# EAGLE board 1nuc_sluyba (EAGLE 8.5.0)
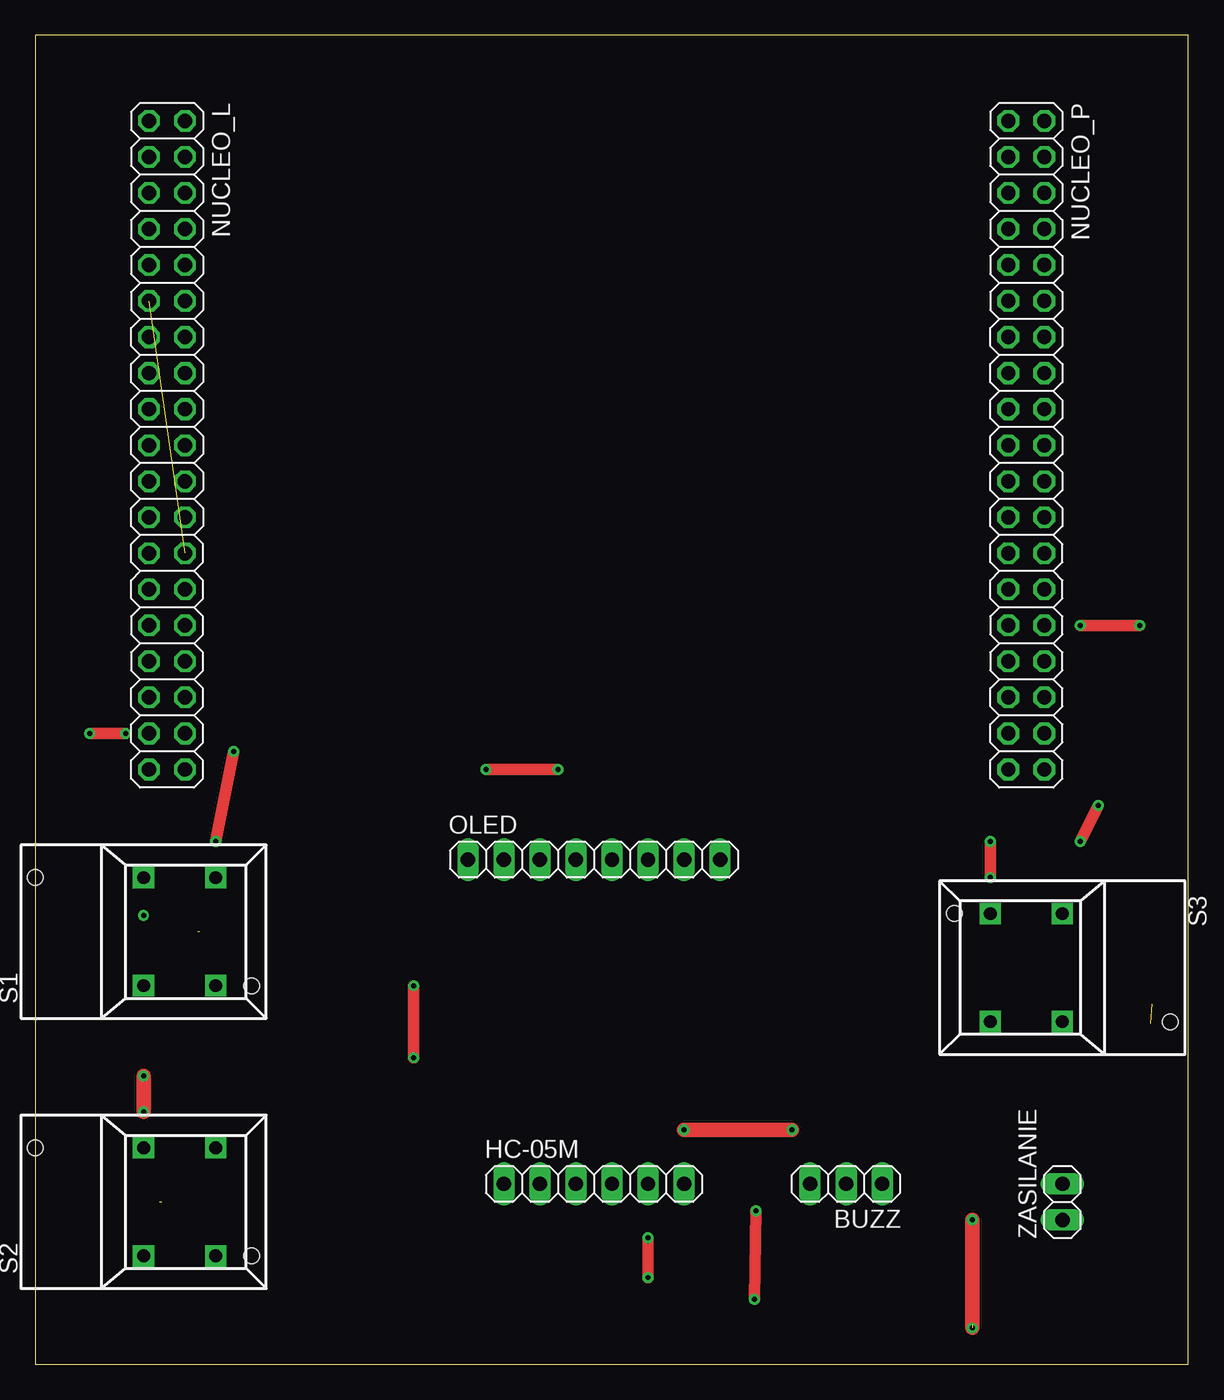
[diagram p0: board, top side]
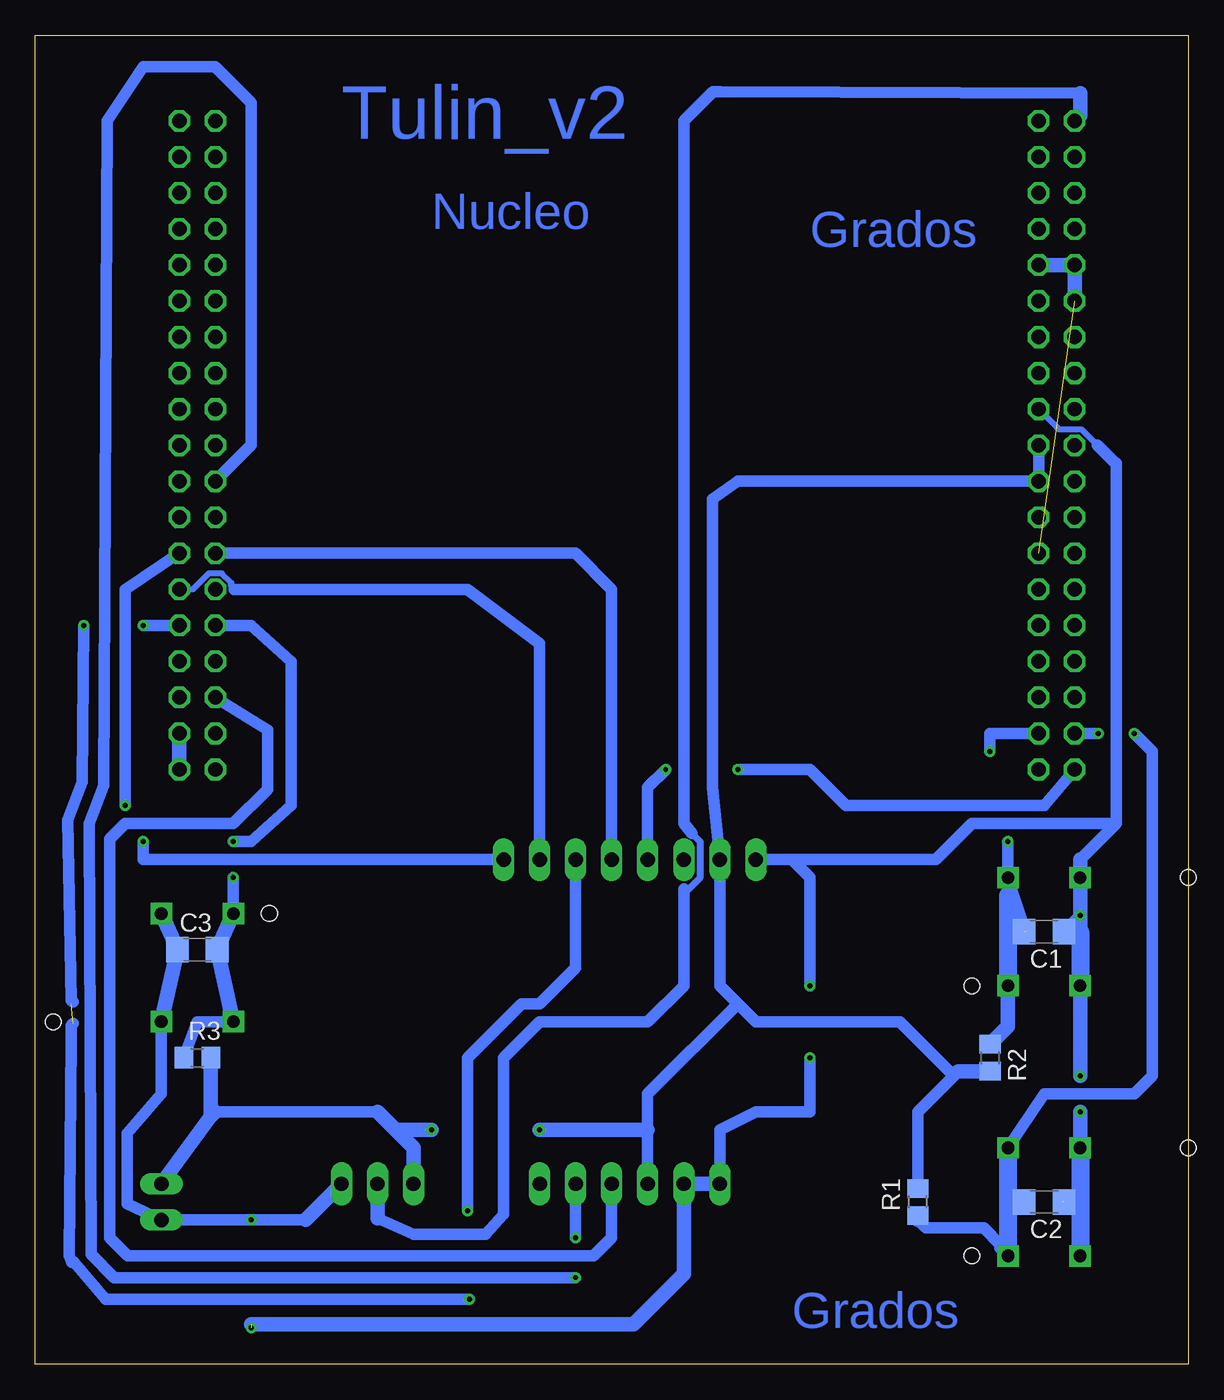
[diagram p1: board, bottom side, seen from below]

Size 81.26 x 93.65 mm. Coordinates in mm from the lower left corner, seen from the top.
Outline: 0,0 81.26,0 81.26,93.65 0,93.65 0,0
Copper layers (1*16): Top 0.035mm / dielectric 1.5mm / Bottom 0.035mm
Design rules "default": minimum track width 6mil, minimum drill 0.35mm, track to track 6mil, track to pad 6mil, pad to pad 6mil, via to via 6mil, smd to smd 6mil, copper to edge 40mil, drill to drill 6mil, minimum pad ring 10mil, minimum via ring 8mil, stop-mask expansion 4mil, vias tented up to drill 0mil, thermal gap 10mil

## Footprints (pad centres in the part's own frame; a part is rotated, then mirrored left to right if it is on the bottom)
1X03 = drill 1.016 long: 1 -2.54,0; 2 0,0; 3 2.54,0
C1206 = smd 1.6 x 1.8: 1 -1.4,0; 2 1.4,0
1X06 = drill 1.016 long: 1 -6.35,0; 2 -3.81,0; 3 -1.27,0; 4 1.27,0; 5 3.81,0; 6 6.35,0
2X19 = drill 1.016 octagon: 1 -22.86,-1.27; 2 -22.86,1.27; 3 -20.32,-1.27; 4 -20.32,1.27; 5 -17.78,-1.27; 6 -17.78,1.27; 7 -15.24,-1.27; 8 -15.24,1.27; 9 -12.7,-1.27; 10 -12.7,1.27; 11 -10.16,-1.27; 12 -10.16,1.27; 13 -7.62,-1.27; 14 -7.62,1.27; 15 -5.08,-1.27; 16 -5.08,1.27; 17 -2.54,-1.27; 18 -2.54,1.27; 19 0,-1.27; 20 0,1.27; 21 2.54,-1.27; 22 2.54,1.27; 23 5.08,-1.27; 24 5.08,1.27; 25 7.62,-1.27; 26 7.62,1.27; 27 10.16,-1.27; 28 10.16,1.27; 29 12.7,-1.27; 30 12.7,1.27; 31 15.24,-1.27; 32 15.24,1.27; 33 17.78,-1.27; 34 17.78,1.27; 35 20.32,-1.27; 36 20.32,1.27; 37 22.86,-1.27; 38 22.86,1.27
1X08 = drill 1.016 long: 1 -8.89,0; 2 -6.35,0; 3 -3.81,0; 4 -1.27,0; 5 1.27,0; 6 3.81,0; 7 6.35,0; 8 8.89,0
R0805 = smd 1.3 x 1.5: 1 -0.95,0; 2 0.95,0
5501 = drill 0.9 pad 1.5 square: 1A 0,3.81; 1B 0,-3.81; NC 5.08,-3.81; NO 5.08,3.81 | hole 1.1: -7.62,3.81; 7.62,-3.81
1X02 = drill 1.016 long: 1 -1.27,0; 2 1.27,0

## Placement (x,y rotation side)
BUZZ  [1X03]  57.15,12.7 180 top
C1  100n  [C1206]  10.16,30.48 180 bottom
C2  100n  [C1206]  10.16,11.43 180 bottom
C3  100n  [C1206]  69.85,29.21 0 bottom
HC-05M  [1X06]  39.37,12.7 0 top
NUCLEO_L  [2X19]  9.27,64.77 270 top
NUCLEO_P  [2X19]  69.85,64.77 270 top
OLED  [1X08]  39.37,35.56 0 top
R1  100k  [R0805]  19.05,11.43 90 bottom
R2  100k  [R0805]  13.97,21.59 270 bottom
R3  100k  [R0805]  69.85,21.59 0 bottom
S1  5501  [5501]  7.62,30.48 0 top
S2  5501  [5501]  7.62,11.43 0 top
S3  5501  [5501]  72.39,27.94 180 top
ZASILANIE  [1X02]  72.39,11.43 90 top

## Library data of the parts
BUZZ HC-05M NUCLEO_L NUCLEO_P OLED ZASILANIE = pinhead
C1-C3 = rcl; SPICEPREFIX: C
R1-R3 = rcl; SPICEPREFIX: R
S1-S3 = switch

## Nets
3V: NUCLEO_L.16
AGND: NUCLEO_P.32
AVDD: NUCLEO_P.7
BOOTO: NUCLEO_L.7
E5V: NUCLEO_L.6
GND: BUZZ.3 HC-05M.3 NUCLEO_L.20 NUCLEO_L.22 OLED.2 R1.2 R2.2 R3.2 ZASILANIE.2
GND1: NUCLEO_L.8
GND2: NUCLEO_P.9
GND3: NUCLEO_L.19
GNDA: NUCLEO_P.20
IOREF: NUCLEO_L.12
NC: NUCLEO_L.9 NUCLEO_L.10 NUCLEO_L.11 NUCLEO_L.26
NCA: NUCLEO_P.10
NCB: NUCLEO_P.18
NCC: NUCLEO_P.36 NUCLEO_P.38
PA0: NUCLEO_L.28
PA1: NUCLEO_L.30
PA2: NUCLEO_P.35
PA3: NUCLEO_P.37
PA4: NUCLEO_L.32
PA5: NUCLEO_P.11
PA6: NUCLEO_P.13
PA7: NUCLEO_P.15
PA8: NUCLEO_P.23
PA9: HC-05M.5 NUCLEO_P.21
PA10: HC-05M.4 NUCLEO_P.33
PA11: NUCLEO_P.14
PA12: NUCLEO_P.12
PA13: NUCLEO_L.13
PA14: NUCLEO_L.15
PA15: NUCLEO_L.17
PB0: NUCLEO_L.34
PB1: NUCLEO_P.24
PB2: NUCLEO_P.22
PB3: NUCLEO_P.31
PB4: NUCLEO_P.27
PB5: C3.2 NUCLEO_P.29 R3.1 S3.NC S3.NO
PB6: NUCLEO_P.17
PB7: NUCLEO_L.21
PB8: NUCLEO_P.3
PB9: NUCLEO_P.5
PB10: NUCLEO_P.25 OLED.5
PB12: NUCLEO_P.16
PB13: NUCLEO_P.30 OLED.6
PB14: NUCLEO_P.28 OLED.7
PB15: NUCLEO_P.26 OLED.8
PC0: NUCLEO_L.38
PC1: C1.2 NUCLEO_L.36 R2.1 S1.NC S1.NO
PC2: C2.2 NUCLEO_L.35 R1.1 S2.NC S2.NO
PC3: NUCLEO_L.37 OLED.4
PC4: NUCLEO_P.34
PC5: NUCLEO_P.6
PC6: NUCLEO_P.4
PC7: NUCLEO_P.19
PC8: NUCLEO_P.2
PC9: NUCLEO_P.1
PC10: BUZZ.2 NUCLEO_L.1
PC11: NUCLEO_L.2
PC12: NUCLEO_L.3
PC13: NUCLEO_L.23
PC14: NUCLEO_L.25
PC15: NUCLEO_L.27
PD2: NUCLEO_L.4
PH0: NUCLEO_L.29
PH1: NUCLEO_L.31
RESET: NUCLEO_L.14
U5V: NUCLEO_P.8
VBAT: NUCLEO_L.33
VCC: BUZZ.1 C1.1 C2.1 C3.1 HC-05M.1 HC-05M.2 NUCLEO_L.18 OLED.1 S1.1A S1.1B S2.1A S2.1B S3.1A S3.1B ZASILANIE.1
VDD: NUCLEO_L.5
VIN: NUCLEO_L.24

## Tracks (layer width: path | path; a pad name or v marks a point on that pad's centre or on a via)
GND  (via drill 0.35)
  Top 1.016: v45.72,16.51 v53.34,16.51
  Bottom 0.813: R1.2 19.05,17.78 16.51,20.32 | 16.51,20.32 16.19,20.64 | 57.15,17.78 68.58,17.78 | 31.75,25.4 30.48,24.13 20.32,24.13 16.51,20.32 | 31.75,25.4 33.02,26.67 OLED.2 33.53,40.64 33.53,60.96 31.75,62.23 NUCLEO_L.22 NUCLEO_L.20 | HC-05M.3 38.1,16.51 38.1,19.05 31.75,25.4
  Bottom 1.016: 16.19,20.64 R2.2 | ZASILANIE.2 68.9,17.46 | 68.9,17.46 R3.2 | BUZZ.3 54.61,15.24 55.88,16.51 | 68.58,17.78 68.9,17.46 | 38.1,16.51 v45.72,16.51 | 55.88,16.51 57.15,17.78 | 55.88,16.51 v53.34,16.51
NC  (1 unrouted)
  Bottom 1.016: NUCLEO_L.11 NUCLEO_L.9 NUCLEO_L.10
NCC
  Bottom 1.016: NUCLEO_P.38 NUCLEO_P.36
PA9  (via drill 0.35)
  Top 0.813: v43.18,6.1 v43.18,8.89
  Bottom 0.813: HC-05M.5 v43.18,8.89 | NUCLEO_P.21 66.04,64.77 66.04,88.9 68.58,91.44 73.66,91.44 76.2,87.63 76.45,40.77 77.47,38.1 77.34,7.75 75.69,6.1 v43.18,6.1
PA10
  Bottom 0.813: HC-05M.4 40.64,8.89 41.91,7.62 74.76,7.62 76.03,8.89 76.03,37 74.93,38.1 67.31,38.1 64.9,40.51 64.9,44.7 NUCLEO_P.33
PB5  (via drill 0.35)
  Top 0.813: v67.31,34.29 v67.31,36.83
  Bottom 0.813: S3.NC v67.31,34.29 | NUCLEO_P.29 66.04,52.07 63.25,49.53 63.25,39.37 66.04,36.83 v67.31,36.83 | R3.1 69.85,24.13 S3.NO
  Bottom 1.016: S3.NO C3.2 S3.NC
PB10
  Bottom 0.813: OLED.5 40.64,54.61 43.18,57.15 NUCLEO_P.25
PB13  (via drill 0.35)  (1 unrouted)
  Top 0.813: v73.66,52.07 v77.85,52.07 | v50.67,4.57 v50.8,10.79
  Bottom 0.076: 78.74,25.65 78.74,25.4
  Bottom 0.61: 78.61,24.01 78.74,22.86
  Bottom 0.813: v50.8,10.79 50.8,21.59 46.99,25.4 45.72,25.4 43.18,27.94 OLED.6 | NUCLEO_P.30 v73.66,52.07 | v77.85,52.07 77.98,41.02 78.99,38.35 78.74,25.65 78.61,25.52 | v50.67,4.57 76.3,4.57 78.56,7.22 78.69,7.19 78.87,7.62 78.74,22.86 78.74,23.88 78.61,24.01
PB14
  Bottom 0.406: 67.26,54.61 67.46,54.81 67.46,55.07 68.12,55.73 69.04,55.73 70.16,54.61 NUCLEO_P.28
  Bottom 0.813: OLED.7 45.72,50.8 50.8,54.61 67.26,54.61
PB15  (via drill 0.35)
  Top 0.813: v73.66,36.83 v74.93,39.37
  Bottom 0.813: OLED.8 73.66,35.56 v73.66,36.83 | NUCLEO_P.26 74.93,54.61 v74.93,39.37
PC1  (via drill 0.35)  (1 unrouted)
  Top 0.813: v12.7,36.83 v13.97,43.18
  Bottom 0.813: S1.NO 11.43,30.48 | S1.NO 12.7,33.02 | S1.NO v12.7,36.83 | NUCLEO_L.36 13.97,44.45 v13.97,43.18
  Bottom 1.016: R2.1 12.7,23.81 S1.NC
  Bottom 1.27: 12.7,33.02 12.7,30.48 | 12.7,30.48 S1.NC | 11.43,30.48 12.7,30.48
PC2  (via drill 0.35)
  Top 0.813: v3.81,44.45 v6.35,44.45
  Bottom 0.813: S2.NC 13.27,8.19 13.27,8.44 14.42,9.59 18.48,9.59 19.05,10.16 | S2.NO 10.16,19.05 3.81,19.05 2.54,20.32 2.54,43.18 v3.81,44.45 | NUCLEO_L.35 v6.35,44.45
  Bottom 1.016: C2.2 12.7,11.43 | R1.1 19.05,10.16
  Bottom 1.27: S2.NO 12.7,11.43 | 12.7,11.43 S2.NC | 12.7,11.43 11.43,11.43
PC3  (via drill 0.35)
  Top 0.813: v31.75,41.91 v36.83,41.91
  Bottom 0.813: OLED.4 38.1,40.64 v36.83,41.91 | NUCLEO_L.37 10.16,39.37 24.13,39.37 26.67,41.91 v31.75,41.91
PC10
  Bottom 0.508: 35.56,33.02 35.56,33.15 34.39,34.31 34.39,36.81 34.99,37.4 35.56,37.97 35.56,38.1 35.56,39.37
  Bottom 0.813: 57.15,10.29 54.61,9.14 49.53,9.14 48.26,10.54 48.26,21.59 45.72,24.13 38.1,24.13 35.56,26.67 35.56,33.02 35.56,33.48 | 34.99,37.4 35.56,38.1 35.56,87.63 33.5,89.69 33.02,89.69 7.62,89.59
  Bottom 1.016: BUZZ.2 57.15,10.29 | 7.62,89.59 7.62,88.01 NUCLEO_L.1
VCC  (via drill 0.35)  (2 unrouted)
  Top 0.813: v26.67,21.59 v26.67,26.67
  Top 1.016: v66.04,2.54 v66.04,10.16 | v7.62,17.78 v7.62,20.32
  Bottom 0.406: NUCLEO_L.18 9.12,65.89 7.54,65.89 6.42,64.77 6.35,64.77
  Bottom 0.813: 62.23,10.16 v66.04,10.16 ZASILANIE.1 74.8,11.3 74.8,16.26 72.39,19.05 S3.1A | 6.42,64.77 5.15,63.5 5.08,63.5 5.08,38.1 | C1.1 v7.62,31.62 | 7.62,35.56 5.08,38.1 | HC-05M.1 33.02,16.51 30.48,17.78 26.67,17.78 v26.67,21.59 | OLED.1 27.94,35.56 | 27.94,35.56 26.67,34.29 v26.67,26.67 | 5.08,38.1 15.24,38.1 17.78,35.56 27.94,35.56
  Bottom 1.016: BUZZ.1 62.23,10.16 | 7.62,30.48 v7.62,31.62 S1.1A 7.62,35.56 | S3.1A C3.1 S3.1B | 66.04,2.79 39.12,2.79 35.56,6.35 HC-05M.2 HC-05M.1 | S2.1A v7.62,17.78 | S1.1B v7.62,20.32
  Bottom 1.27: S1.1B 7.62,30.48 8.89,30.48 | S2.1A 7.62,11.43 | 7.62,11.43 S2.1B | 7.62,11.43 8.89,11.43

## Text on the board
Bottom: Tulin_v2 | Nucleo | Grados | Grados